# EAGLE board Beetle_PCB (EAGLE 9.6.2)
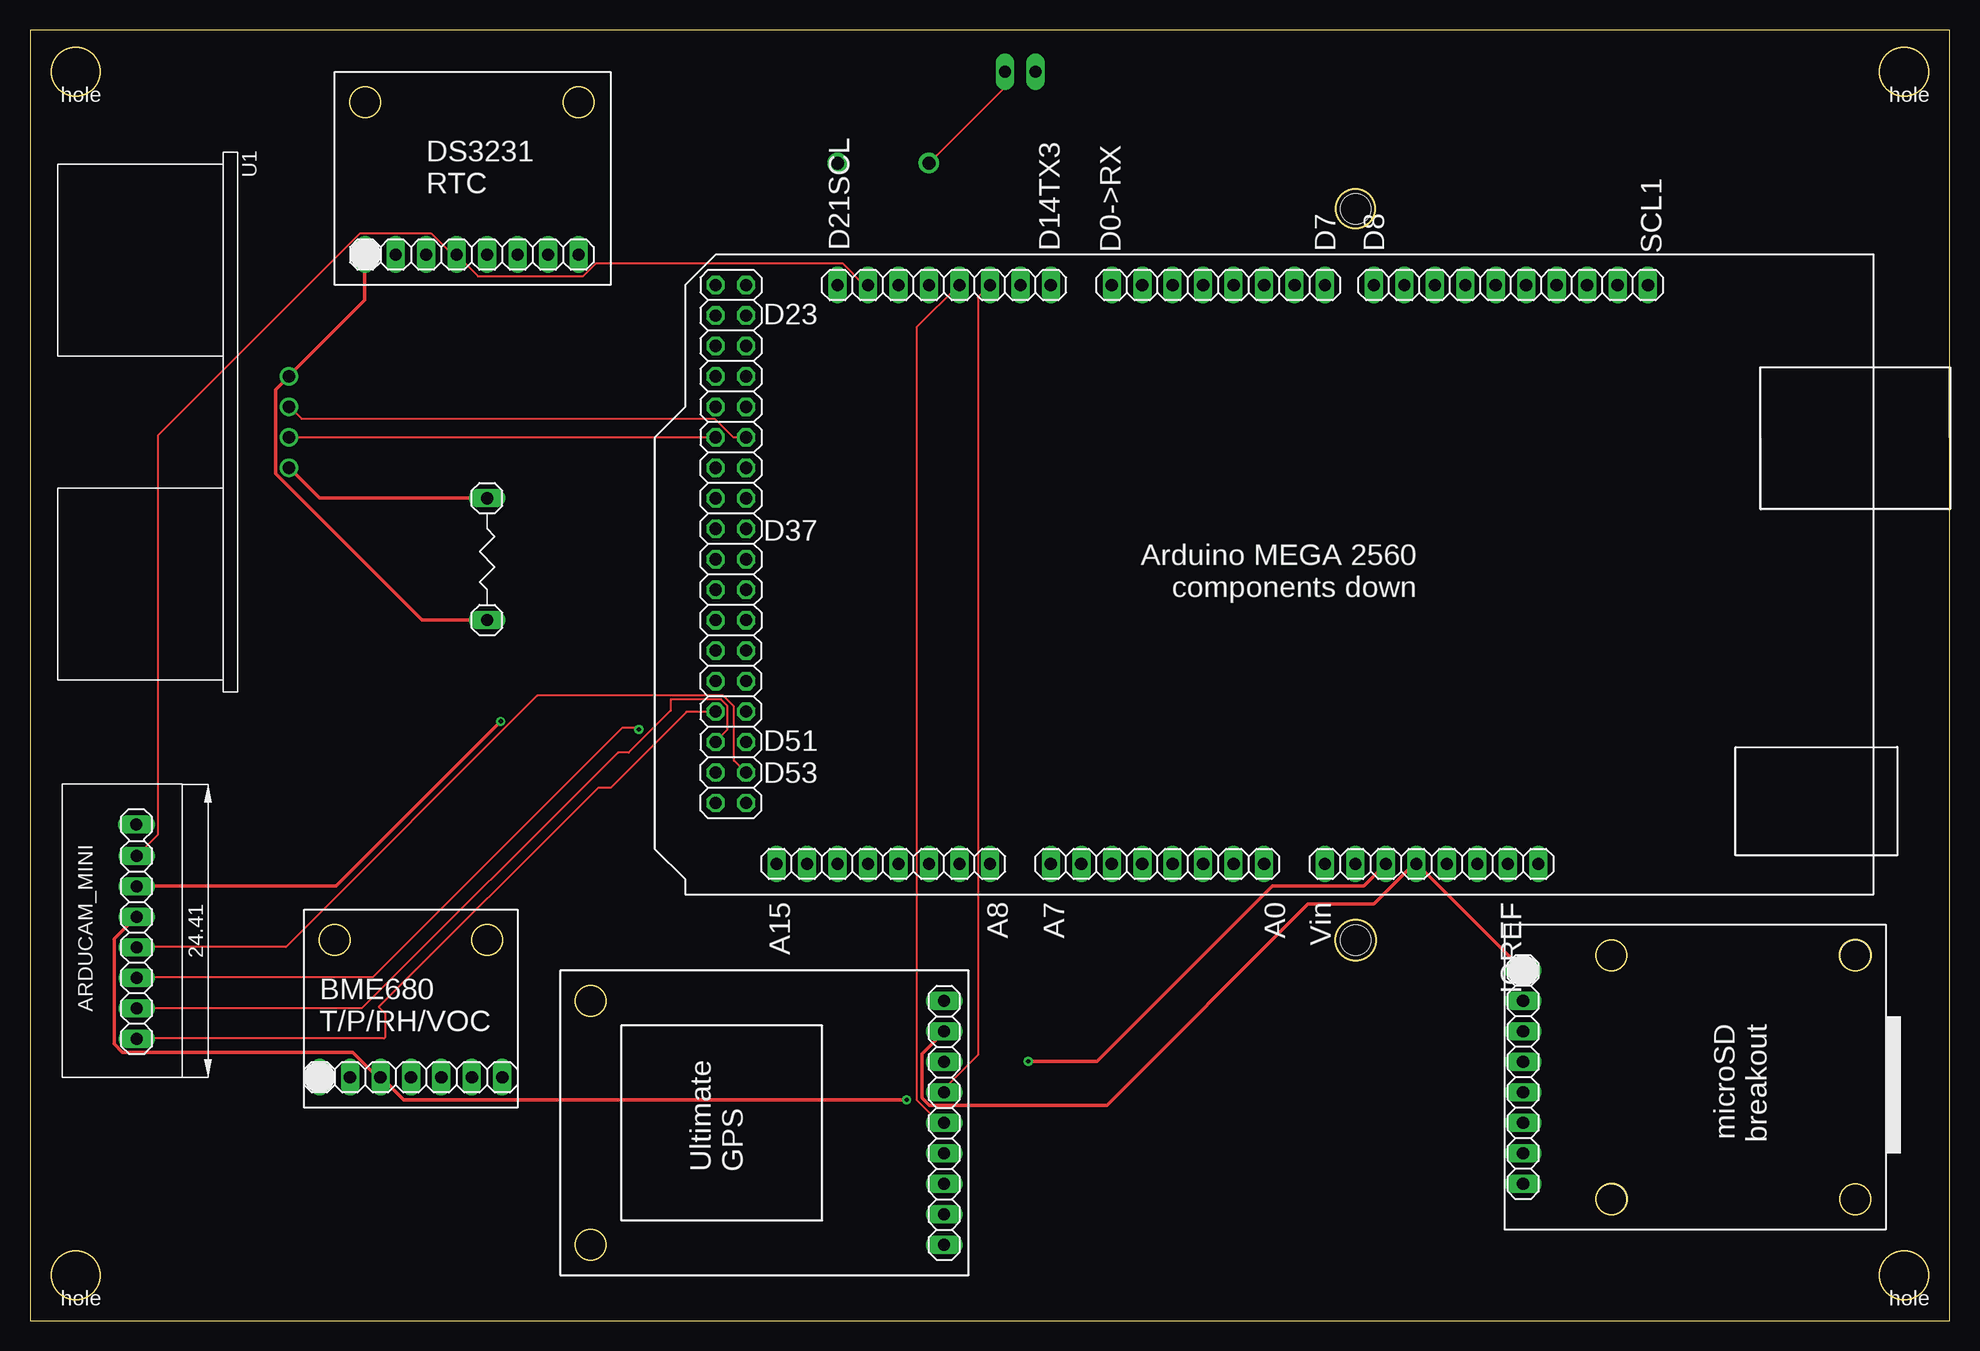
[diagram p0: board, top side]
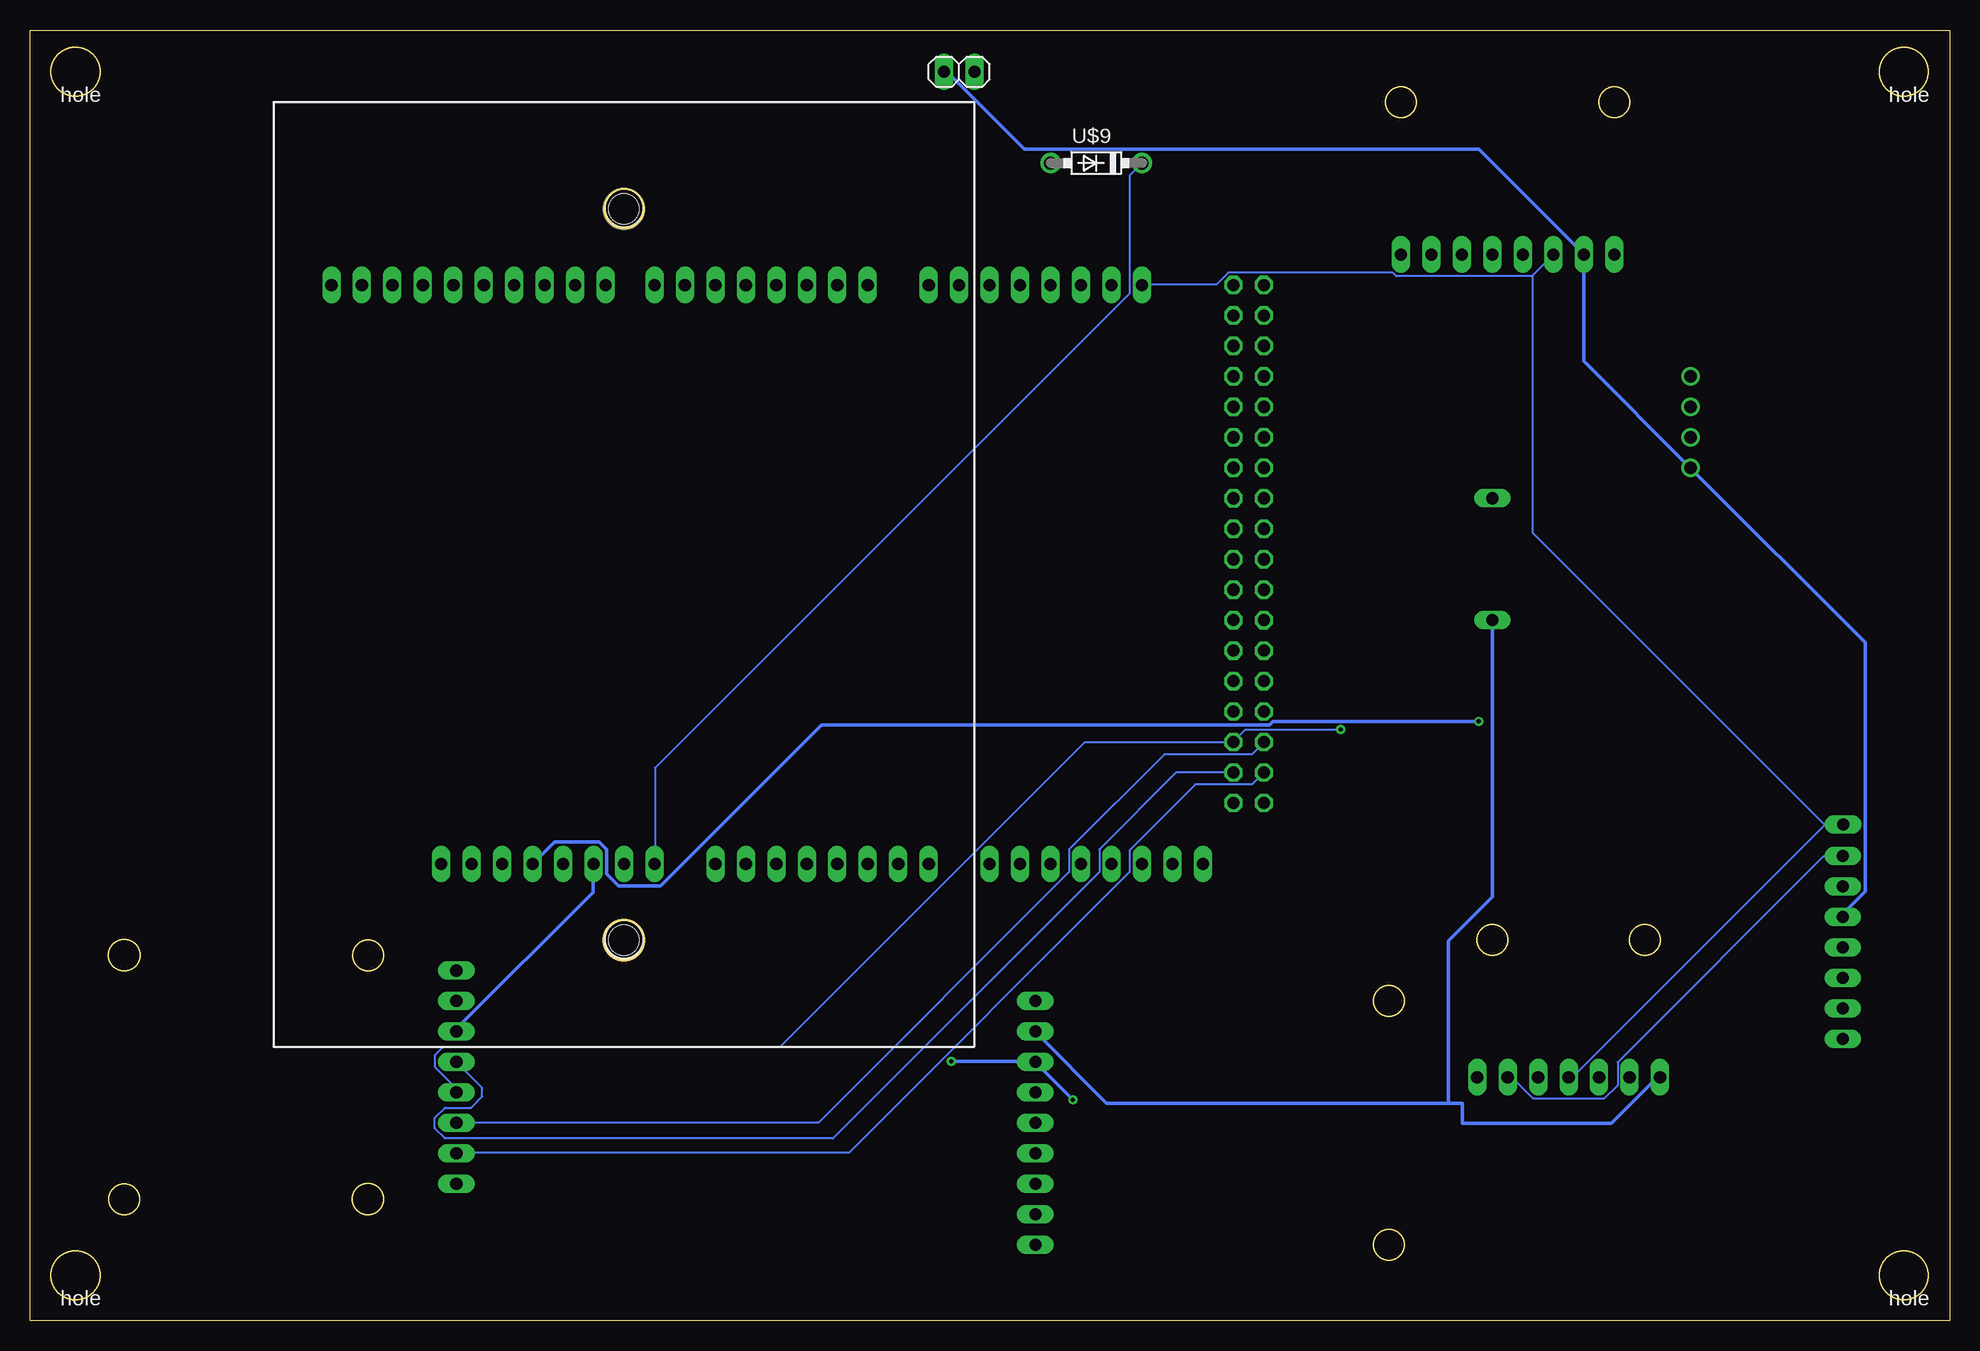
[diagram p1: board, bottom side, seen from below]

Size 160 x 107.62 mm. Coordinates in mm from the lower left corner, seen from the top.
Outline: 0,0 160,0 160,107.62 0,107.62 0,0
Copper layers (1*16): Top 0.035mm / dielectric 1.5mm / Bottom 0.035mm
Design rules "default": minimum track width 6mil, minimum drill 0.35mm, track to track 6mil, track to pad 6mil, pad to pad 6mil, via to via 6mil, smd to smd 6mil, copper to edge 40mil, drill to drill 6mil, minimum pad ring 10mil, minimum via ring 8mil, stop-mask expansion 4mil, vias tented up to drill 0mil, thermal gap 10mil
Net classes: 1 power: width 0.305 mm

## Footprints (pad centres in the part's own frame; a part is rotated, then mirrored left to right if it is on the bottom)
XCVR_HC-SR04 = drill 1.02: 1 -3.81,0; 2 -1.27,0; 3 1.27,0; 4 3.81,0
GDG_ARDUINO_MEGA2560_PKG = drill 1.016 long: 3.3V 35.56,50.8; 5V1 38.1,50.8; A0 50.8,50.8; A1 53.34,50.8; A2 55.88,50.8; A3 58.42,50.8; A4 60.96,50.8; A5 63.5,50.8; A6 66.04,50.8; A7 68.58,50.8; A8 73.66,50.8; A9 76.2,50.8; A10 78.74,50.8; A11 81.28,50.8; A12 83.82,50.8; A13 86.36,50.8; A14 88.9,50.8; A15 91.44,50.8; AREF 23.876,2.54; D0->RX 63.5,2.54; D1<-TX 60.96,2.54; D2 58.42,2.54; D3 55.88,2.54; D4 53.34,2.54; D5 50.8,2.54; D6 48.26,2.54; D7 45.72,2.54; D8 41.656,2.54; D9 39.116,2.54; D10 36.576,2.54; D11 34.036,2.54; D12 31.496,2.54; D13 28.956,2.54; D14TX3 68.58,2.54; D15RX3 71.12,2.54; D16TX2 73.66,2.54; D17RX2 76.2,2.54; D18TX1 78.74,2.54; D19RX1 81.28,2.54; D20SDA 83.82,2.54; D21SCL 86.36,2.54; GND1 40.64,50.8; GND2 43.18,50.8; GND3 26.416,2.54; IOREF 30.48,50.8; NC 27.94,50.8; RESET 33.02,50.8; SCL1 18.796,2.54; SDA1 21.336,2.54; VIN 45.72,50.8 | drill 1.016 octagon: 5V2 93.98,2.54; 5V3 96.52,2.54; D22 93.98,5.08; D23 96.52,5.08; D24 93.98,7.62; D25 96.52,7.62; D26 93.98,10.16; D27 96.52,10.16; D28 93.98,12.7; D29 96.52,12.7; D30 93.98,15.24; D31 96.52,15.24; D32 93.98,17.78; D33 96.52,17.78; D34 93.98,20.32; D35 96.52,20.32; D36 93.98,22.86; D37 96.52,22.86; D38 93.98,25.4; D39 96.52,25.4; D40 93.98,27.94; D41 96.52,27.94; D42 93.98,30.48; D43 96.52,30.48; D44 93.98,33.02; D45 96.52,33.02; D46 93.98,35.56; D47 96.52,35.56; D48 93.98,38.1; D49 96.52,38.1; D50 93.98,40.64; D51 96.52,40.64; D52 93.98,43.18; D53 96.52,43.18; GND4 93.98,45.72; GND5 96.52,45.72
GDG_BME680_PKG = drill 1.016 long: 1 0,0; 2 2.54,0; 3 5.08,0; 4 7.62,0; 5 10.16,0; 6 12.7,0; 7 15.24,0 | hole 2.54: 1.27,11.43; 13.97,11.43
GDG_ULTIMATE_GPS_PKG = drill 1.016 long: 3.3V 0,0; EN 2.54,0; FIX 7.62,0; GND 15.24,0; PPS 20.32,0; RX 12.7,0; TX 10.16,0; VBAT 5.08,0; VIN 17.78,0 | hole 2.54: 0,29.464; 20.32,29.464
GDG_DS3231_PKG = drill 1.016 long: 1 0,0; 2 2.54,0; 3 5.08,0; 4 7.62,0; 5 10.16,0; 6 12.7,0; 7 15.24,0; 8 17.78,0 | hole 2.54: 0,12.7; 17.78,12.7
GDG_MICROSD_PKG = drill 1.016 long: 1 0,0; 2 2.54,0; 3 5.08,0; 4 7.62,0; 5 10.16,0; 6 12.7,0; 7 15.24,0; 8 17.78,0 | hole 2.54: -1.27,27.686; 19.05,27.686; 19.05,7.366; -1.27,7.366
GDG_5XAA_BATTERY_PKG = drill 1.016 long: BATTERY_7.5V 0,-2.54; BATTERY_GND 2.54,-2.54 | hole 2.54: 29.21,69.85; 29.21,8.89
ARDUCAM_MINI = drill 1.016 long: CS 3.2,3.81; GND 13.36,3.81; MISO 8.28,3.81; MOSI 5.74,3.81; SCK 10.82,3.81; SCL 21.082,3.835; SDA 18.44,3.81; VCC 15.9,3.81
GDG_RESISTOR_PKG = drill 1.016 long: 1 0,0; 2 10.16,0
GDG_1N5817_PKG = drill 1.1 pad 1.7: A -3.81,0; C 3.81,0
GDG_MOUNTING_HOLE_4MM_PKG = hole 4.064: 0,0

## Placement (x,y rotation side)
U1  HC-SR04  [XCVR_HC-SR04]  21.59,74.93 270 top
U$1  GDG_ARDUINO_MEGA2560_DEV  [GDG_ARDUINO_MEGA2560_PKG]  153.67,88.9 180 top
U$2  GDG_BME680_DEV  [GDG_BME680_PKG]  24.13,20.32 0 top
U$3  GDG_ULTIMATE_GPS_DEV  [GDG_ULTIMATE_GPS_PKG]  76.2,6.35 90 top
U$4  GDG_DS3231_DEV  [GDG_DS3231_PKG]  27.94,88.9 0 top
U$5  GDG_MICROSD_DEV  [GDG_MICROSD_PKG]  124.46,29.21 270 top
U$6  GDG_5XAA_BATTERY_DEV  [GDG_5XAA_BATTERY_PKG]  81.28,101.6 180 bottom
U$7  [ARDUCAM_MINI]  12.7,20.32 90 top
U$8  1k  [GDG_RESISTOR_PKG]  38.1,58.42 90 top
U$9  GDG_1N5817_DEV  [GDG_1N5817_PKG]  71.12,96.52 0 bottom
U$10  [GDG_MOUNTING_HOLE_4MM_PKG]  3.81,3.81 0 top
U$11  [GDG_MOUNTING_HOLE_4MM_PKG]  3.81,104.14 0 top
U$12  [GDG_MOUNTING_HOLE_4MM_PKG]  156.21,104.14 0 top
U$13  [GDG_MOUNTING_HOLE_4MM_PKG]  156.21,3.81 0 top

## Library data of the parts
U1 = HC-SR04; AVAILABILITY: In Stock; DESCRIPTION: HC-SR04 Ultrasonic Sensor Qwiic Platform Evaluation Expansion Board; MF: SparkFun Electronics; MP: HC-SR04; PACKAGE: None; PRICE: None; PURCHASE-URL: https://pricing.snapeda.com/search/part/HC-SR04/?ref=eda
U$1-U$6 U$8-U$13 = GDG_library
U$7 = RL_library

## Nets
3V [power]: U$1.3.3V U$7.VCC
5V [power]: U1.1 U$1.5V1 U$2.1 U$3.VIN U$4.1 U$5.1 U$8.1
CAMCS: U$1.D49 U$7.CS
CLK: U$1.D52 U$5.4 U$7.SCK
DI: U$1.D51 U$5.6 U$7.MOSI
DO: U$1.D50 U$5.5 U$7.MISO
ECHO: U1.3 U$1.D31
GND [power]: U1.4 U$1.GND1 U$2.3 U$3.GND U$4.2 U$5.3 U$6.BATTERY_GND U$7.GND U$8.2
GPSRX: U$1.D16TX2 U$3.RX
GPSTX: U$1.D17RX2 U$3.TX
N$1: U$6.BATTERY_7.5V U$9.A
SCK: U$1.D21SCL U$2.4 U$4.3 U$7.SCL
SDCS: U$1.D53 U$5.7
SDI: U$1.D20SDA U$2.6 U$4.4 U$7.SDA
TRIG: U1.2 U$1.D30
VIN: U$1.VIN U$9.C

## Tracks (layer width: path | path; a pad name or v marks a point on that pad's centre or on a via)
3V  (via drill 0.35)
  Top 0.305: v39.24,49.99 25.53,36.27 8.91,36.27 U$7.VCC
  Bottom 0.305: v39.24,49.99 56.39,49.99 56.69,49.68 94.03,49.68 107.44,36.27 110.95,36.27 111.94,37.26 111.94,39.32 112.55,39.93 116.28,39.93 U$1.3.3V
5V
  Top 0.305: U$8.1 38.1,58.45 32.69,58.45 20.5,70.64 20.5,77.65 U1.1 21.64,78.87 27.89,85.12 27.89,88.85 U$4.1 | U$5.1 124.44,29.26 115.59,38.1 U$1.5V1 115.44,38.02 115.29,38.02 112.01,34.75 106.53,34.75 89.76,17.98 74.98,17.98 74.37,18.59 74.37,22.25 76.2,24.08 U$3.VIN
  Bottom 0.305: 41.76,18.14 70.26,18.14 76.2,24.08 U$3.VIN | 41.76,18.14 40.62,18.14 40.62,16.48 28.17,16.48 24.38,20.27 24.16,20.27 U$2.1 | U$8.1 38.1,35.36 41.76,31.7 41.76,18.14
CAMCS
  Top 0.152: U$7.CS 8.91,23.55 29.52,23.55 29.59,23.62 29.59,25.65 29.08,26.16 47.37,44.45 48.39,44.45 54.71,50.77 54.71,50.75 57.15,50.75 U$1.D49
CLK
  Top 0.152: U$7.SCK 8.91,31.17 21.34,31.17 42.29,52.12 57.76,52.12 58.67,51.21 58.67,46.71 59.66,45.72 U$1.D52
  Bottom 0.152: U$5.4 122.3,19.43 122.3,18.72 123.24,17.78 125.4,17.78 126.26,16.92 126.26,16.08 125.4,15.21 93.07,15.21 70.87,37.41 70.87,39.32 64.47,45.72 U$1.D52
DI
  Top 0.152: U$7.MOSI 27.66,26.06 49.02,47.37 49.91,47.37 53.42,50.88 53.42,51.82 57.61,51.82 58.14,51.28 58.14,49.3 57.15,48.31 U$1.D51
  Bottom 0.152: U$5.6 124.44,16.54 94.26,16.54 73.38,37.41 73.38,39.32 65.46,47.24 58.14,47.24 57.15,48.23 U$1.D51
DO  (via drill 0.35)
  Top 0.152: v50.75,49.3 50.62,49.43 49.35,49.43 28.57,28.65 8.91,28.65 U$7.MISO
  Bottom 0.152: v50.75,49.3 58.67,49.3 59.66,48.31 U$1.D50 59.74,48.23 72.08,48.23 97.48,22.84 125.58,22.84 126.26,22.15 126.26,21.18 124.51,19.43 124.51,19.05 U$5.5
ECHO
  Top 0.152: U$1.D31 57.15,73.69 21.64,73.69 U1.3
GND  (via drill 0.35)
  Top 0.305: v83.21,21.64 88.92,21.64 103.56,36.27 111.18,36.27 113,38.1 U$1.GND1 | U$7.GND 8.84,33.68 7.01,31.85 7.01,23.09 7.7,22.4 26.9,22.4 28.96,20.34 29.18,20.34 U$2.3 29.34,20.27 31.17,18.44 v73.08,18.44 | U$8.2 24.16,68.58 21.64,71.09 U1.4
  Bottom 0.305: v83.21,21.64 76.2,21.64 U$3.GND 76.12,21.49 v73.08,18.44 | U$5.3 124.44,24.16 124.44,24.38 113.08,35.74 113.08,38.1 U$1.GND1 | U$6.BATTERY_GND 83.82,104.09 83.52,104.09 77.11,97.69 39.24,97.69 30.56,89 U$4.2 30.48,80.01 U1.4 7.01,56.54 7.01,35.81 8.84,33.98 8.84,33.68 U$7.GND
GPSRX
  Top 0.152: U$3.RX 76.2,19.36 79.02,22.17 79.02,85.34 80.01,86.34 U$1.D16TX2
GPSTX
  Top 0.152: U$3.TX 76.2,16.54 75.82,16.54 73.91,18.44 73.91,82.83 77.42,86.34 U$1.D17RX2
N$1
  Top 0.152: U$6.BATTERY_7.5V 81.23,104.09 81.23,102.79 74.98,96.55 U$9.A
SCK
  Bottom 0.152: U$4.3 34.78,87.14 | 34.78,87.14 34.82,87.1 46.1,87.1 46.41,87.4 60.12,87.4 61.11,86.41 67.28,86.41 U$1.D21SCL | 10.4,41.34 10.36,41.38 8.91,41.38 U$7.SCL | 10.4,41.34 31.39,20.34 31.7,20.34 U$2.4 | 10.4,41.34 34.75,65.68 34.75,87.1 34.78,87.14
SDCS
  Bottom 0.152: U$1.D53 58.14,44.73 62.87,44.73 68.35,39.24 68.35,37.41 91.75,14.02 124.44,14.02 U$5.7
SDI
  Top 0.152: U$1.D20SDA 69.8,86.41 69.49,86.41 67.74,88.16 47.17,88.16 46.1,87.1 37.34,87.1 35.59,88.85 U$4.4 35.51,88.93 35.2,88.93 33.45,90.68 27.51,90.68 10.67,73.84 10.67,40.54 U$7.SDA
  Bottom 0.152: U$2.6 36.8,20.27 36.42,20.27 34.67,18.52 28.8,18.52 27.66,19.66 27.66,21.57 10.52,38.71 8.91,38.71 U$7.SDA
TRIG
  Top 0.152: U$1.D30 59.66,73.69 58.6,73.69 57.07,75.21 22.63,75.21 21.64,76.2 U1.2
VIN
  Bottom 0.152: U$9.C 68.35,95.48 68.35,85.65 107.9,46.1 107.9,38.1 U$1.VIN

## Text on the board
tDocu: DS3231 RTC | Distance Sensor | Group 1 - "The Beatles" / PHYS371 - Spring 2023 / Lin, Koth, Pavithran, Pasquesi | ArduinoMega 2560 | PCB version 1.0 / Design done on / February 28th 2023 | BME680 | Arducam Pinout | JLCJLCJLCJLC | Project in collaboration with / Prof. Spencer (ACES) | MicroSD | Ultimate GPS